# EAGLE board tiu_tracking_detector (EAGLE 5.11)
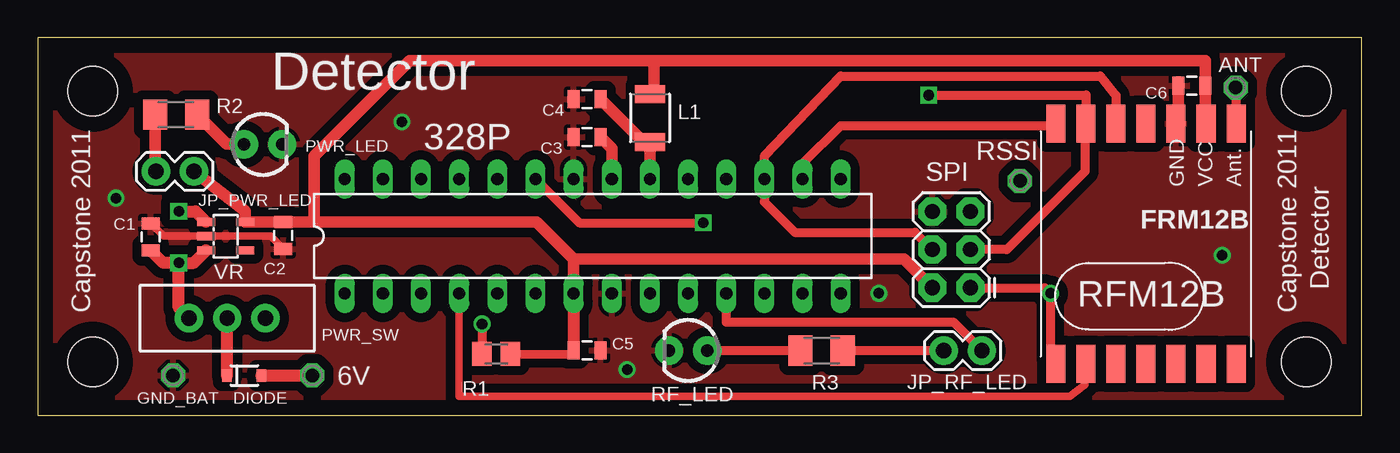
[diagram p0: board, top side]
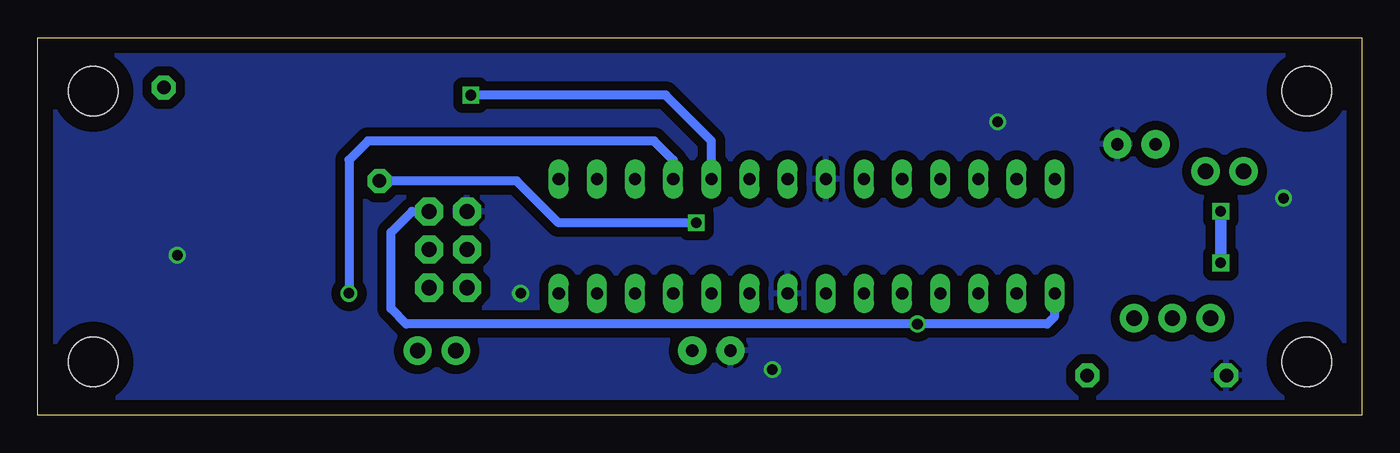
[diagram p1: board, bottom side, seen from below]

Size 88.16 x 25.17 mm. Coordinates in mm from the lower left corner, seen from the top.
Outline: 0.03,0 88.16,0 88.16,25.17 0,25.17 0.03,0
Copper layers (1*16): Top 0.035mm / dielectric 1.5mm / Bottom 0.035mm
Design rules "default *": minimum track width 10mil, minimum drill 24mil, track to track 8mil, track to pad 8mil, pad to pad 8mil, via to via 8mil, smd to smd 8mil, copper to edge 40mil, drill to drill 8mil, minimum pad ring 10mil, minimum via ring 8mil, stop-mask expansion 4mil, vias tented up to drill 0mil, thermal gap 10mil
Net classes: 1 power: width 0.381 mm, clearance 0.254 mm

## Footprints (pad centres in the part's own frame; a part is rotated, then mirrored left to right if it is on the bottom)
1,6/0,8 = drill 0.9 pad 1.6 octagon: 1 0,0
DIL28-3 = drill 0.813 long: 1 -16.51,-3.81; 2 -13.97,-3.81; 3 -11.43,-3.81; 4 -8.89,-3.81; 5 -6.35,-3.81; 6 -3.81,-3.81; 7 -1.27,-3.81; 8 1.27,-3.81; 9 3.81,-3.81; 10 6.35,-3.81; 11 8.89,-3.81; 12 11.43,-3.81; 13 13.97,-3.81; 14 16.51,-3.81; 15 16.51,3.81; 16 13.97,3.81; 17 11.43,3.81; 18 8.89,3.81; 19 6.35,3.81; 20 3.81,3.81; 21 1.27,3.81; 22 -1.27,3.81; 23 -3.81,3.81; 24 -6.35,3.81; 25 -8.89,3.81; 26 -11.43,3.81; 27 -13.97,3.81; 28 -16.51,3.81
0805 = smd 0.8 x 1.2: 1 -0.9,0; 2 0.9,0
SOD-323 = smd 0.63 x 0.83: 1 -1.15,0; 2 1.15,0
RFM12B = smd 2.54 x 1.27: ANT 8,-6; FFS -8,2; GND 8,-2; IRQ -8,4; P$8 -8,0; P$9 -8,-2; P$10 -8,-4; P$12 -8,-6; P$16 8,0; SCK 8,4; SDI 8,2; SDO -8,6; SEL 8,6; VDD 8,-4
1X02 = drill 1.016 pad 1.88 round: 1 0,0; 2 2.54,0
1210 = smd 1.2 x 2: 1 -1.6,0; 2 1.6,0
LED3MM = drill 0.813 pad 1.88 round: A -1.27,0; K 1.27,0
SWITCH-SPDT = drill 1.016 pad 1.88 round: 1 0,2.54; 2 0,0; 3 0,-2.54
M0805 = smd 1.3 x 1.6: 1 -0.95,0; 2 0.95,0
M1206 = smd 1.6 x 2: 1 -1.4,0; 2 1.4,0
2X3 = drill 1.016 pad 1.88 octagon: 1 0,0; 2 0,2.54; 3 2.54,0; 4 2.54,2.54; 5 5.08,0; 6 5.08,2.54
STAND-OFF = hole 3.302: 0,0
SOT23-5L = smd 0.55 x 1.2: 1 -0.95,-1.3; 2 0,-1.3; 3 0.95,-1.3; 4 0.95,1.3; 5 -0.95,1.3

## Placement (x,y rotation side)
6V  [1,6/0,8]  18.29,2.67 0 top
328P  ATMEGA 328  [DIL28-3]  36.96,11.94 0 top
ANT  [1,6/0,8]  79.76,21.84 0 top
C1  1u  [0805]  7.54,11.89 90 top
C2  1u  [0805]  16.36,11.99 270 top
C3  0.1u  [0805]  36.58,18.54 180 top
C4  0.1u  [0805]  36.58,21.08 180 top
C5  0.1u  [0805]  36.58,4.32 0 top
C6  0.1u  [0805]  76.84,21.97 180 top
DIODE  [SOD-323]  13.77,2.67 0 top
FRM12B  RFM12B  [RFM12B]  73.79,11.43 90 top
GND_BAT  [1,6/0,8]  9.02,2.67 0 top
JP_PWR_LED  [1X02]  10.41,16.26 180 top
JP_RF_LED  [1X02]  62.87,4.32 180 top
L1  10uH  [1210]  40.77,19.81 270 top
PWR_LED  [LED3MM]  15.01,18.06 0 top
PWR_SW  [SWITCH-SPDT]  12.62,6.48 90 top
R1  10k  [M0805]  30.53,4.09 0 top
R2  1k  [M1206]  9.22,20.04 180 top
R3  1k  [M1206]  52.2,4.32 0 top
RF_LED  [LED3MM]  43.31,4.32 180 top
RSSI  [1,6/0,8]  65.41,15.62 0 top
SPI  AVR_SPI_PRG_6PTH  [2X3]  62.1,8.51 90 top
U$1  [STAND-OFF]  3.68,21.59 0 top
U$2  [STAND-OFF]  3.68,3.56 0 top
U$3  [STAND-OFF]  84.46,21.59 0 top
U$4  [STAND-OFF]  84.46,3.56 0 top
VR  TPS769XX  [SOT23-5L]  12.52,11.94 270 top

## Library data of the parts
6V ANT FRM12B GND_BAT RSSI = JeeLabs
328P = atmega8
C1-C6 DIODE JP_PWR_LED JP_RF_LED L1 PWR_LED PWR_SW RF_LED SPI U$1-U$4 = SparkFun
R1-R3 = resistor
VR = tps769xx

## Nets
GND [power]: 328P.8 328P.22 C1.2 C2.2 C3.2 C4.2 C5.2 C6.2 FRM12B.GND GND_BAT.1 PWR_LED.K RF_LED.K SPI.6 VR.2
N$1: 328P.1 R1.1 SPI.5
N$2: 328P.18 FRM12B.SDO SPI.1
N$3: 328P.17 FRM12B.SDI SPI.4
N$4: 328P.16 FRM12B.SEL
N$5: 328P.19 FRM12B.SCK SPI.3
N$6: 328P.23 RSSI.1
N$7: 328P.4 FRM12B.IRQ
N$8: 6V.1 DIODE.2
N$9: DIODE.1 PWR_SW.2
N$10: C1.1 PWR_SW.1 VR.1 VR.3
N$11: PWR_LED.A R2.1
N$12: R3.1 RF_LED.A
N$13: ANT.1 FRM12B.ANT
N$14: 328P.11 JP_RF_LED.1
N$15: JP_RF_LED.2 R3.2
N$16: JP_PWR_LED.2 R2.2
N$17 [power]: 328P.20 C4.1 L1.2
N$19: 328P.21 C3.1
VCC [power]: 328P.7 C2.1 C5.1 C6.1 FRM12B.VDD JP_PWR_LED.1 L1.1 R1.2 SPI.2 VR.5

## Tracks (layer width: path | path; a pad name or v marks a point on that pad's centre or on a via)
GND  (via drill 0.7)
  Top 0.508: C1.2 8.39,11.94 VR.2 15.51,11.94 C2.2
  Top 0.762: C6.2 75.94,19.58 FRM12B.GND
  other vias: 56.01,8.13 5.21,14.48 39.24,3.05 24.26,19.56 78.87,10.67
  pour Top (isolate 0.61): 0,25.15 88.16,25.2 88.21,0.08 0,0
  pour Bottom (isolate 0.61): 0.03,25.12 0.03,0 88.16,0.08 88.16,25.22
N$1  (via drill 0.7)
  Top 0.61: R1.1 29.59,5.92 v29.59,6.1
  Bottom 0.61: SPI.5 63.25,13.59 64.64,12.19 64.64,7.11 63.63,6.1 v29.59,6.1 20.95,6.1 20.45,6.6 328P.1
N$2  (via drill 0.7)
  Top 0.61: FRM12B.SDO 67.44,3.78 v67.44,8.13 67.06,8.51 SPI.1
  Bottom 0.61: 328P.18 45.85,17.02 47.12,18.29 66.17,18.29 67.44,17.02 v67.44,8.13
N$3
  Top 0.61: FRM12B.SDI 71.79,21.3 70.74,22.61 53.47,22.61 48.39,17.27 328P.17 48.39,14.22 50.42,12.19 58.42,12.19 SPI.4
N$4
  Top 0.61: 328P.16 50.93,16.76 53.47,19.3 67.66,19.3 FRM12B.SEL
N$5  (via drill 0.7)
  Top 0.61: v59.31,21.34 69.79,21.34 FRM12B.SCK 69.72,19.37 69.72,16.26 64.52,11.05 SPI.3
  Bottom 0.61: v59.31,21.34 46.35,21.34 43.31,18.29 328P.19
N$6  (via drill 0.7)
  Top 0.61: 328P.23 36.07,12.83 v44.32,12.83
  Bottom 0.61: v44.32,12.83 53.47,12.83 56.26,15.62 RSSI.1
N$7
  Top 0.508: 328P.4 28.07,1.27 68.71,1.27 69.72,2.03 69.72,3.37
  Top 0.61: 69.72,3.37 FRM12B.IRQ
N$8
  Top 0.813: DIODE.2 6V.1
N$9
  Top 0.61: PWR_SW.2
  Top 0.813: DIODE.1 PWR_SW.2
N$10  (via drill 0.7)
  Top 0.559: VR.1 11.02,12.9
  Top 0.813: VR.3 10.39,10.16 v9.4,10.16 | v9.4,13.59 10.52,13.59 VR.1 | C1.1 8.37,10.16 v9.4,10.16 | PWR_SW.1 9.4,7.16 v9.4,10.16
  Bottom 0.762: v9.4,10.16 v9.4,13.59
N$11
  Top 0.762: R2.1 12.6,18.06 PWR_LED.A
N$12
  Top 0.61: RF_LED.A R3.1
N$13
  Top 0.61: ANT.1 79.79,21.84 FRM12B.ANT
N$14
  Top 0.61: JP_RF_LED.1 60.96,6.22 45.85,6.22 328P.11
N$15
  Top 0.61: R3.2 JP_RF_LED.2
N$16
  Top 0.559: JP_PWR_LED.2 7.82,16.26
  Top 0.762: 7.82,16.26 R2.2
N$17
  Top 0.61: L1.2 40.77,17.96 | L1.2 40.95,18.29 40.77,18.29 L1.2
  Top 0.762: 328P.20 L1.2 40.35,18.21 C4.1
N$19
  Top 0.762: C3.1 38.23,17.79 328P.21
VCC
  Top 0.559: C2.1
  Top 0.61: R1.2 35.42,4.06 C5.1
  Top 0.762: FRM12B.VDD 77.74,19.48 C6.1 77.72,21.97 77.72,23.62 41.02,23.62 | 41.02,23.62 41.02,21.28 | SPI.2 57.66,10.41 35.69,10.41 | 35.69,10.41 328P.7 | C2.1 VR.5 13.82,13.61 JP_PWR_LED.1 | 35.69,10.41 33.21,12.89 18.41,12.89 | C2.1 18.41,12.89 | 41.02,23.62 24.77,23.62 18.41,17.27 18.41,12.89
  Top 0.813: 41.02,21.28 L1.1 | C5.1 328P.7

## Text on the board
tNames: Detector | Detector | RFM12B | Capstone 2011 | Capstone 2011